# Allegro board BP2_02V7.brd
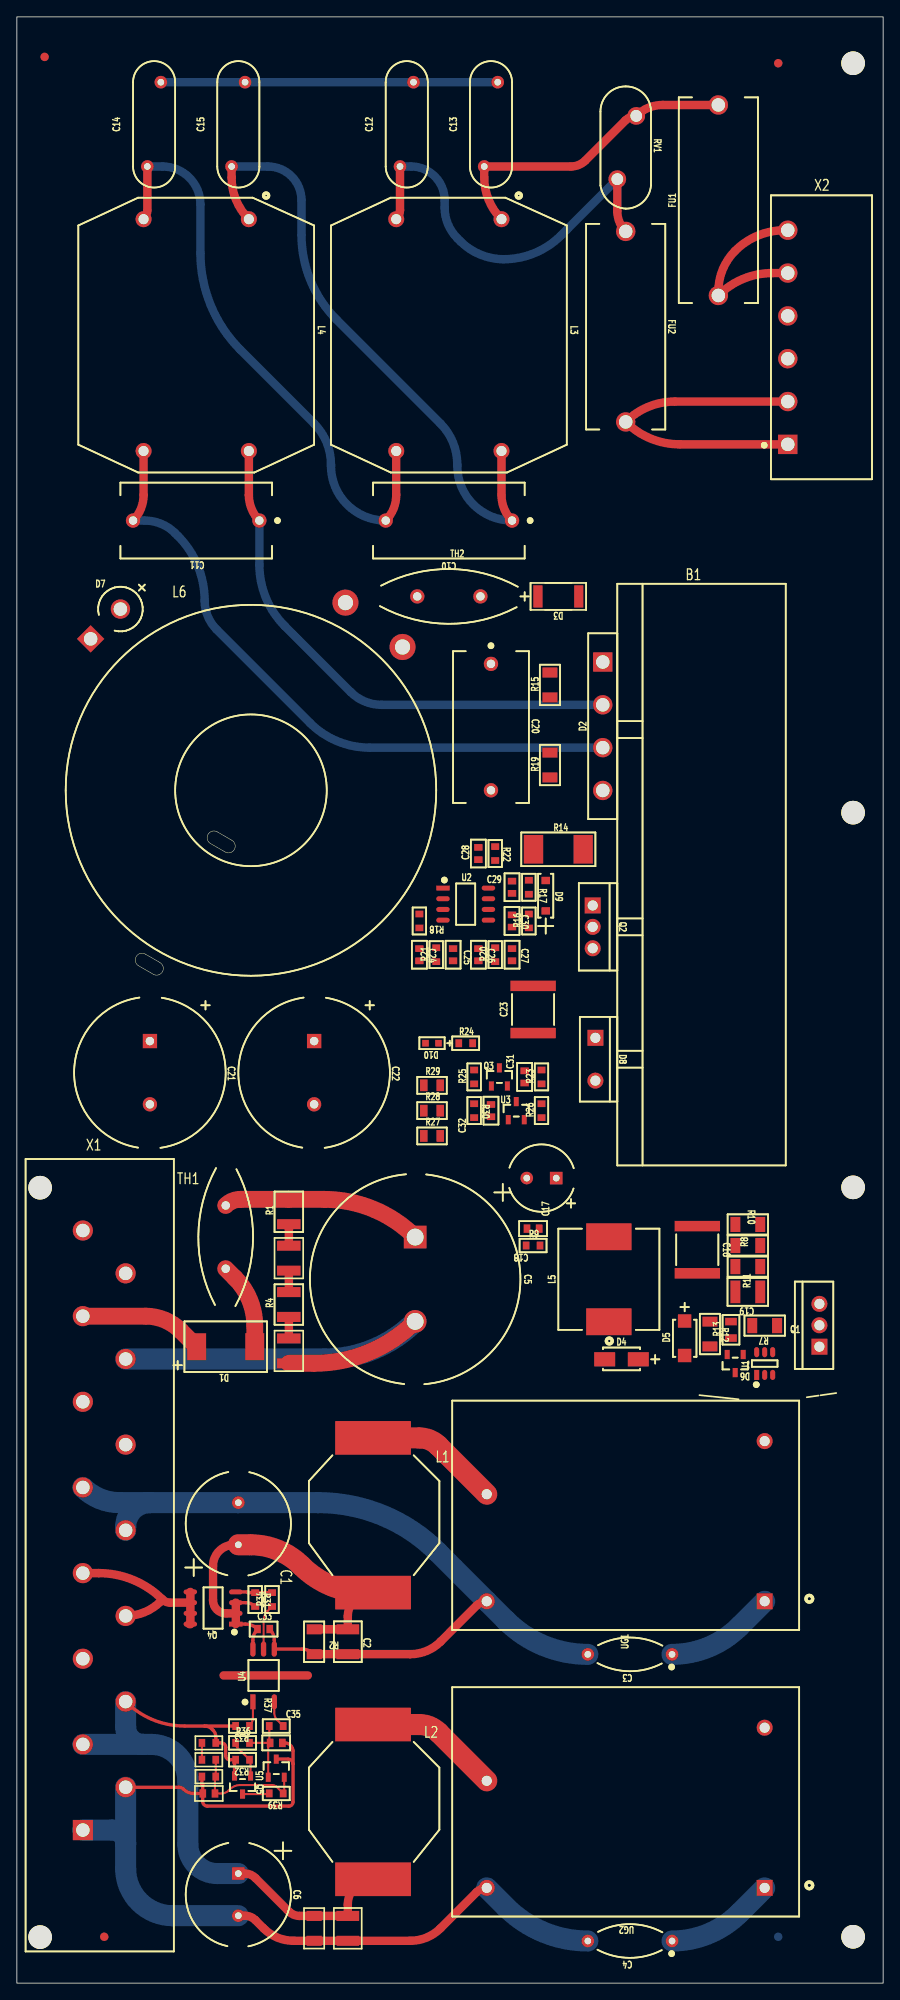
[diagram p0: board, top side]
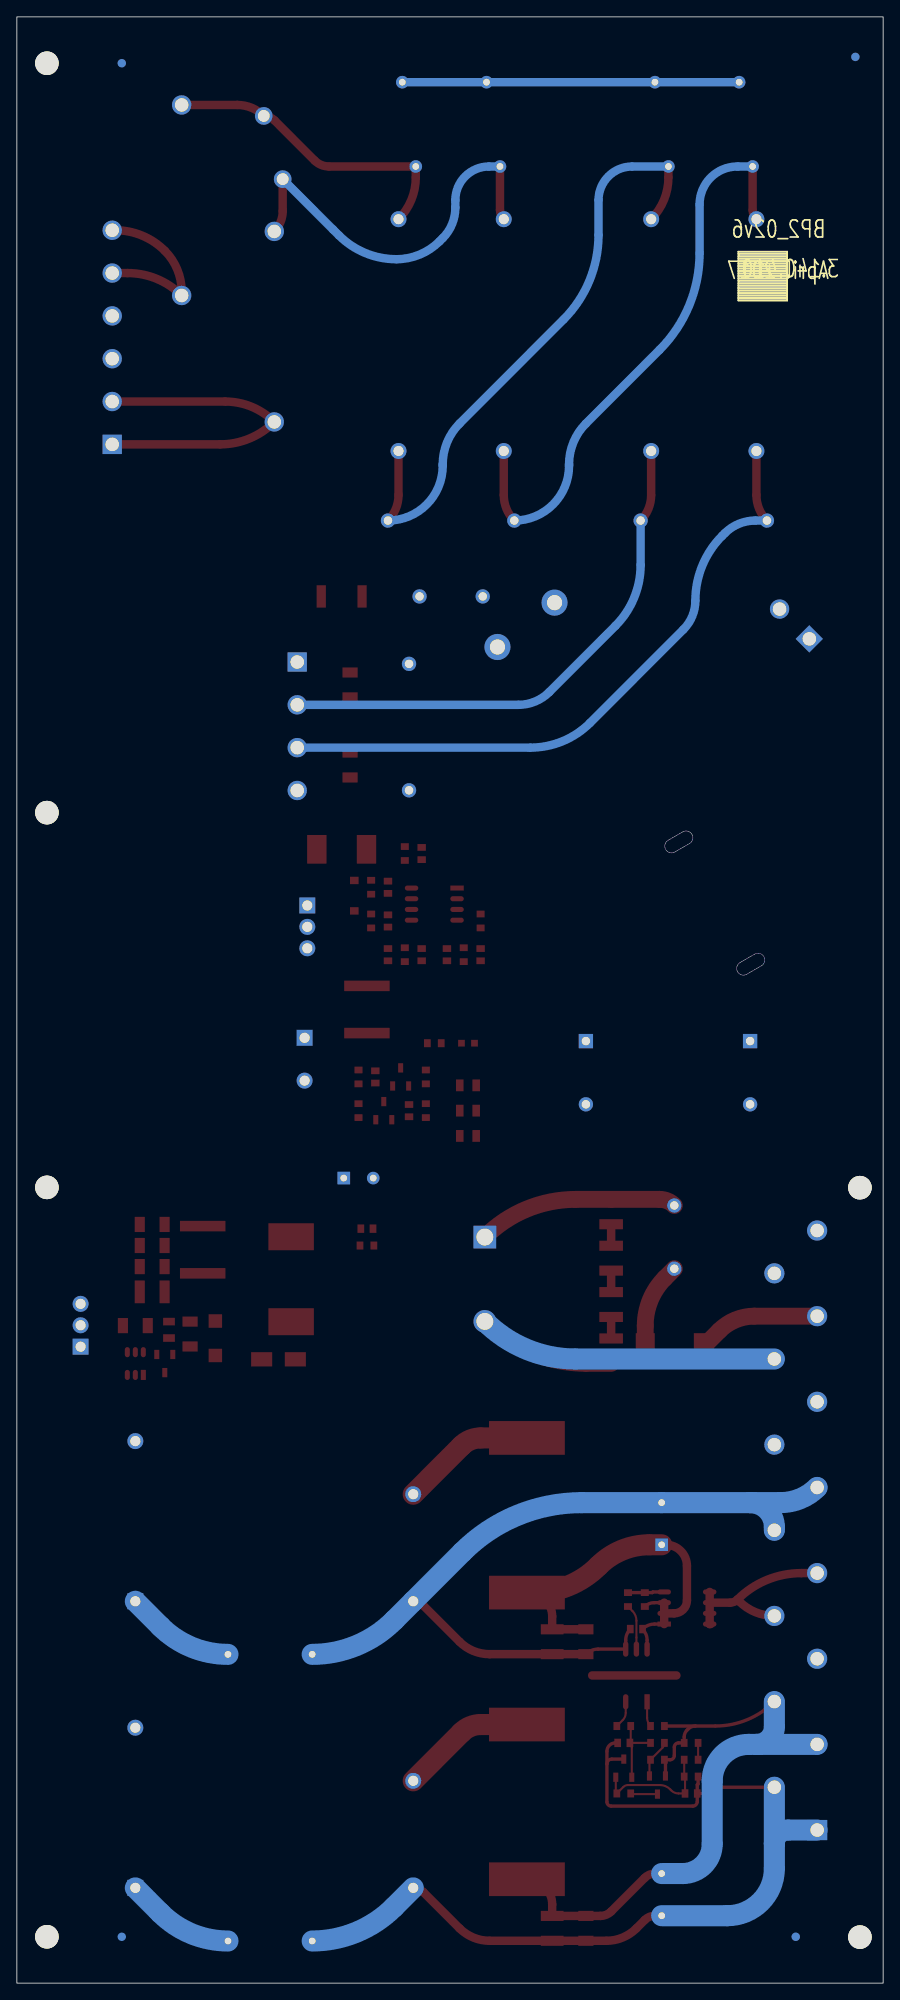
[diagram p1: board, bottom side, seen from below]

Outline 102.87 x 233.25 mm; copper layers: TOP, BOTTOM. Coordinates in mm from the lower left corner of the outline.
Outline path: rectangle 0,0 102.87,233.25

## Design rules (mm)
net group 220V: nets +UB -UB

## Placement (name value [footprint] x y rotation side)
B1  *3.181.006  [HEAT_SINK_AVAX_PWR_PFCS6_V1]  81.3 131.5 0 top
C1  470uF  [CAPPRR500W60L1250T1250H2000N]  26.3 54.5 90 top
C2  10uF  [CAPC3225X250N]  39.3 40.5 270 top
C3  470pF  [CAPRR1000W55L900T400H900N]  72.8 39 180 top
C4  470pF  [CAPRR1000W55L900T400H900N]  72.8 5 180 top
C5  100uF  [CAPPRR1000W55L2500T2500H2500N]  47.3 83.5 270 top
C6  470uF  [CAPPRR500W60L1250T1250H2000N]  26.3 10.5 270 top
C7  10uF  [CAPC3225X250N]  39.3 6.5 270 top
C10  0.47uF  [CAPRR1500W80L1800T900H1750N]  51.3 173.5 180 top
C11  0.47uF  [CAPRR1500W80L1800T900H1750N]  21.3 173.5 180 top
C12  2200pF  [CAPRR1000W60L1500T700H1000N]  46.3 220.5 90 top
C13  2200pF  [CAPRR1000W60L1500T700H1000N]  56.3 220.5 90 top
C14  2200pF  [CAPRR1000W60L1500T700H1000N]  16.3 220.5 90 top
C15  2200pF  [CAPRR1000W60L1500T700H1000N]  26.3 220.5 90 top
C16  0.1uF  [CAPC5750X200N]  80.8 87 270 top
C17  100u  [CAPPRR350W60L800T800H1150N]  62.3 95.5 180 top
C18  0.1uF  [CAPC1608X90N]  61.3 89.5 180 top
C19  10uF  [CAPC3225X200N]  86.8 82 180 top
C20  0.47uF  [CAPRR1500W80L1800T900H1750N]  56.3 149 270 top
C21  47uF  [CAPPRR750W80L1800T1800H2000N]  15.8 108 270 top
C22  47uF  [CAPPRR750W80L1800T1800H2000N]  35.3 108 270 top
C23  0.1uF  [CAPC5750X200N]  61.3 115.5 90 top
C24  *820pF  [CAPC1608X90N]  47.8 122 270 top
C25  *1500pF  [CAPC1608X90N]  51.8 122 270 top
C26  10uF  [CAPC1608X90N]  54.8 122 270 top
C27  0.15uF  [CAPC1608X90N]  58.8 122 270 top
C28  *680pF  [CAPC1608X90N]  54.8 134 90 top
C29  0.1uF  [CAPC1608X90N]  58.8 130 90 top
C30  1uf  [CAPC1608X90N]  58.8 126 270 top
C31  0.1uF  [CAPC1608X90N]  60.3 107.5 90 top
C32  10uF  [CAPC1608X90N]  56.3 103.5 90 top
C33  0.1uF  [CAPC1608X90N]  29.3 42 0 top
C34  0.01uF  [CAPC1608X90N]  22.8 22.5 180 top
C35  0.01uF  [CAPC1608X90N]  30.8 28.5 0 top
D1  S3M  [DIOM7959X265N]  24.8 75.5 180 top
D2  GBU8J-BP  [DIOB_GBU8J]  69.57 156.72 90 top
D3  SM4007  [DIOMELF5025N]  64.3 164.5 180 top
D4  US1M  [DIOM5126X240N]  71.8 74 0 top
D5  ES1J  [DIOM5026X250N]  79.3 76.5 90 top
D6  BZX84C24  [SOT95P230X110-3N]  85.3 73.5 270 top
D7  1N5408  [DIOAD1750W127L838D521N]  12.3 163 45 top
D8  C3D06060F  [TO_2200C508P0X1_1005X260X1570]  68.7 112.14 270 top
D9  MBR0540  [SOT95P375X128-2N]  62.8 129 270 top
D10  KP-1608SGC  [LEDC1608X110N]  49.3 111.5 180 top
FU1  MC000830  [SOCKET_MC000830]  83.3 211.5 90 top
FU2  MC000830  [SOCKET_MC000830]  72.3 196.5 270 top
L1  4.7uH 8.5A  [INDC22090X700N]  42.3 55.5 270 top
L2  4.7uH 8.5A  [INDC22090X700N]  42.3 21.5 270 top
L3  7mH  [WURTH_744834407]  51.3 195.5 270 top
L4  7mH  [WURTH_744834407]  21.3 195.5 270 top
L5  470uH 1A  [INDM120120X800N]  70.3 83.5 90 top
L6  *600uH 5A  [IND_PFCINDUCTOR_V1]  27.8 141.5 15 top
NOREF  -  [unnamed]  99.3 227.75 0 top
NOREF#2  -  [#2]  0 233.25 0 top
NOREF#3  -  [unnamed#2]  10.38 5.5 0 top
NOREF#4  -  [unnamed#2]  3.3 228.5 0 top
NOREF#5  -  [unnamed]  99.3 138.85 0 top
NOREF#6  -  [unnamed]  99.3 5.5 0 top
NOREF#7  -  [#2]  102.87 0 90 top
NOREF#8  -  [unnamed#2]  90.41 227.75 0 top
NOREF#9  -  [unnamed]  99.3 94.4 0 top
NOREF#10  -  [unnamed#2]  90.41 227.75 180 bottom
NOREF#11  -  [unnamed#2]  3.3 228.5 180 bottom
NOREF#12  -  [#2]  14.3 202.5 180 bottom
NOREF#13  -  [unnamed#2]  90.41 5.5 180 bottom
NOREF#14  -  [unnamed#2]  10.38 5.5 180 bottom
Q1  FJP2145TU  [TO_2200C254P0X1_1036X292X1595]  95.3 75.5 90 top
Q2  IPP60R099C7XKSA1  [TO_2200C254P0X1_1036X292X1595]  68.38 127.84 270 top
Q3  IRLML5103  [SOT95P230X110-3N]  57.3 107.5 90 top
Q4  IRF7410  [SOIC127P600X175-8N]  23.3 44.5 180 top
Q5  IRLML5103  [SOT95P230X110-3N]  26.8 23.5 270 top
R1  33k  [RESC3226X55N]  32.3 91.5 90 top
R2  1k  [RESC3216X50N]  35.3 40.5 270 top
R3  33k  [RESC3226X55N]  32.3 86 90 top
R4  33k  [RESC3226X55N]  32.3 80.5 90 top
R5  33k  [RESC3226X55N]  32.3 75 90 top
R6  4.7k  [RESC3216X50N]  35.3 6.5 270 top
R7  1.00  [RESC3216X50N]  88.8 78 180 top
R8  200k  [RESC3216X50N]  86.8 90 180 top
R9  10k  [RESC1608X45N]  61.3 87.5 0 top
R10  200k  [RESC3216X50N]  86.8 87.5 0 top
R11  200k  [RESC3216X50N]  86.8 85 180 top
R12  150k  [RESC3216X50N]  82.3 77 270 top
R13  51.0k  [RESC2013X50N]  84.8 77.5 90 top
R14  *0.051  [RESC6432X55N]  64.3 134.5 0 top
R15  510k  [RESC3216X50N]  63.3 154 90 top
R16  10k  [RESC1608X45N]  60.8 126 90 top
R17  3.3  [RESC1608X45N]  60.8 130 270 top
R18  220  [RESC1608X45N]  47.8 126 270 top
R19  510k  [RESC3216X50N]  63.3 144.5 90 top
R20  51.0k  [RESC1608X45N]  56.8 122 90 top
R21  18.0k  [RESC1608X45N]  49.8 122 90 top
R22  14.7k  [RESC1608X45N]  56.8 134 270 top
R23  2k  [RESC1608X45N]  62.3 107.5 90 top
R24  10k  [RESC1608X45N]  53.3 111.5 0 top
R25  1M  [RESC1608X45N]  54.3 107.5 90 top
R26  4.7k  [RESC1608X45N]  62.3 103.5 90 top
R27  100k  [RESC2013X50N]  49.3 100.5 0 top
R28  100k  [RESC2013X50N]  49.3 103.5 0 top
R29  100k  [RESC2013X50N]  49.3 106.5 0 top
R30  10.0k  [RESC1608X45N]  54.3 103.5 270 top
R31  10k  [RESC1608X45N]  28.3 45.5 270 top
R32  10k  [RESC1608X45N]  26.8 26.5 180 top
R33  2.2k  [RESC1608X45N]  26.8 30.5 180 top
R34  10k  [RESC1608X45N]  30.3 45.5 90 top
R35  10.5k  [RESC1608X45N]  22.8 28.5 0 top
R36  10k  [RESC1608X45N]  26.8 28.5 0 top
R37  2.2k  [RESC1608X45N]  30.8 30.5 0 top
R38  8.25k  [RESC1608X45N]  22.8 26.5 0 top
R39  255k  [RESC1608X45N]  30.8 22.5 180 top
R40  2.4k  [RESC1608X45N]  22.8 24.5 0 top
RV1  JVR-14N391K  [VAR_JVR-14N391K]  71.3 221.5 270 top
TH1  47  [RESRB750W80L1750T650H2300]  24.8 88.5 270 top
TH2  7  [RESRB750W80L1750T650H2300]  51.3 164.5 0 top
U1  UCC28722DBV  [SOT95P280X145-6N]  88.8 73.5 90 top
U2  UCC28180D  [SOIC127P600X175-8N]  53.3 128 0 top
U3  TL431AIDBZ  [SOT95P230X110-3N]  59.3 103.5 90 top
U4  ACPL-M50L-500E  [SOIC127P700X250-6N]  29.3 36.5 90 top
U5  TL431AIDBZ  [SOT95P230X110-3N]  30.8 25.5 90 top
UG1  TMG 15105  [DIP1900P3300X1910-4N]  72.3 55.5 180 top
UG2  TMG 15124  [DIP1900P3300X1910-4N]  72.3 21.5 180 top
X1  09061152911  [DIN41612-H15]  7.84 18.16 270 top
X2  231-536/001-000  [WAGO_231-536]  91.55 182.54 90 top

## Library data of the parts
B1 = heat sink_0
C1 C5 C6 C17 C21 C22 = CAPACITOR_POL
C2-C4 C7 C10-C16 C18-C20 C23-C35 = CAPACITOR
D1 D3-D5 = DIODE
D2 = DIOD_MOST_KBU6M_0
D6 = STAB_3
D7 = DIODE: alternate symbols: (DIOADV500W125L530D530N)
D8 D9 = SHOTTKY
D10 = LED
FU1 FU2 = HOLDER_FUSE
L1 L2 = INDUCTOR_F
L3 L4 = DLW21H
L5 L6 = INDUCTOR
Q1 = TransistorNPN_TO220
Q2 = MOS_n_channel_induced_2
Q3 Q5 = MOS_p_channel_induced_1
Q4 = IRF7410_v2
R1 R3-R5 = R_0.5W
R2 R6-R40 = RESISTOR
RV1 = VARISTOR
TH1 = THERMISTOR
TH2 = thermistor
U1 = UCC28722
U2 = UCC28180
U3 U5 = TL431AIDBZ
U4 = ACPL-M50L
UG1 UG2 = TRACO_TMG_15
X1 = DIN41612-H15_10
X2 = CONN6_1

## Footprints (pads in the part's own frame, mm; a bottom-side part is the same pattern mirrored in y, then rotated)
CAPC1608X90N
  rect 0.8x1 smd: 1(-0.725,0) 2(0.725,0)
CAPC3225X200N
  rect 1.2x2.7 smd: 1(-1.475,0) 2(1.475,0)
CAPC3225X250N
  rect 1.2x2.7 smd: 1(-1.475,0) 2(1.475,0)
CAPC5750X200N
  rect 1.25x5.4 smd: 1(-2.8,0) 2(2.8,0)
CAPPRR350W60L800T800H1150N
  rect 1.5x1.5 hole 0.8: 1(-1.75,0)
  round 1.5 hole 0.8: 2(1.75,0)
CAPPRR500W60L1250T1250H2000N
  rect 1.5x1.5 hole 0.8: 1(-2.5,0)
  round 1.5 hole 0.8: 2(2.5,0)
CAPPRR750W80L1800T1800H2000N
  rect 1.7x1.7 hole 1: 1(-3.75,0)
  round 1.7 hole 1: 2(3.75,0)
CAPPRR1000W55L2500T2500H2500N
  rect 2.7x2.7 hole 2: 1(-5,0)
  round 2.7 hole 2: 2(5,0)
CAPRR1000W55L900T400H900N
  round 1.5 hole 0.8: 1(-5,0) 2(5,0)
CAPRR1000W60L1500T700H1000N
  round 1.5 hole 0.8: 1(-5,0.8) 2(5,-0.8)
CAPRR1500W80L1800T900H1750N
  round 1.7 hole 1: 1(-7.5,0) 2(7.5,0)
DIN41612-H15
  round 2.8 hole 2.8 unplated: (-76.2,-5.08) (12.7,-5.08)
  rect 2.4x2.4 hole 1.6: 4(0,0)
  round 2.4 hole 1.6: 6(-5.08,5.08) 8(-10.16,0) 10(-15.24,5.08) 12(-20.32,0) 14(-25.4,5.08) 16(-30.48,0) 18(-35.56,5.08) 20(-40.64,0) 22(-45.72,5.08) 24(-50.8,0) 26(-55.88,5.08) 28(-60.96,0) 30(-66.04,5.08) 32(-71.12,0)
DIOAD1750W127L838D521N
  rect 2.3x2.3 hole 1.6: 1(-5,0)
  round 2.3 hole 1.6: 2(0,0)
DIOB_GBU8J
  rect 2.3x2.3 hole 1.6: 1(0,0)
  round 2.3 hole 1.6: 2(-5.08,0) 3(-10.16,0) 4(-15.24,0)
DIOM5026X250N
  rect 1.6x1.6 smd: 1(-2.043,0) 2(2.043,0)
DIOM5126X240N
  rect 2.5x1.7 smd: 1(-2,0) 2(2,0)
DIOM7959X265N
  rect 2.26x3.2 smd: 1(-3.45,0) 2(3.45,0)
DIOMELF5025N
  rect 1.1x2.65 smd: 1(-2.425,0) 2(2.425,0)
DIP1900P3300X1910-4N
  rect 1.9x1.9 hole 1.2: 1(-16.5,10.2)
  round 1.9 hole 1.2: 2(-16.5,-8.8) 3(16.5,10.2) 4(16.5,-2.5)
IND_PFCINDUCTOR_V1
  round 3.1 hole 1.8: 1(16.6,18.6) 2(21.787,11.762)
INDC22090X700N
  rect 4x9 smd: 1(-9.175,0) 2(9.175,0)
INDM120120X800N
  rect 3.2x5.4 smd: 1(-5.038,0) 2(5.038,0)
LEDC1608X110N
  rect 0.8x0.8 smd: 1(-0.775,0) 2(0.775,0)
RESC1608X45N
  rect 0.8x0.95 smd: 1(-0.825,0) 2(0.825,0)
RESC2013X50N
  rect 0.9x1.4 smd: 1(-0.975,0) 2(0.975,0)
RESC3216X50N
  rect 1.2x1.8 smd: 1(-1.475,0) 2(1.475,0)
RESC3226X55N
  rect 1.2x2.8 smd: 1(-1.475,0) 2(1.475,0)
RESC6432X55N
  rect 2.3x3.4 smd: 1(-2.95,0) 2(2.95,0)
RESRB750W80L1750T650H2300
  round 1.7 hole 1: 1(-3.75,0) 2(3.75,0)
SOCKET_MC000830
  round 2.3 hole 1.6: 1(-11.3,0) 2(11.3,0)
SOIC127P600X175-8N
  rect 1.6x0.6 smd: 1(-2.7,1.905)
  oval 1.6x0.6 smd: 2(-2.7,0.635) 3(-2.7,-0.635) 4(-2.7,-1.905) 5(2.7,-1.905) 6(2.7,-0.635) 7(2.7,0.635) 8(2.7,1.905)
SOIC127P700X250-6N
  rect 1.8x0.64 smd: 1(-3.125,1.27)
  oval 1.8x0.64 smd: 3(-3.125,-1.27) 4(3.125,-1.27) 5(3.125,0) 6(3.125,1.27)
SOT95P230X110-3N
  rect 1.1x0.6 smd: 1(-1.075,0.95) 2(-1.075,-0.95) 3(1.075,0)
SOT95P280X145-6N
  rect 1.2x0.6 smd: 1(-1.35,0.95)
  oval 1.2x0.6 smd: 2(-1.35,0) 3(-1.35,-0.95) 4(1.35,-0.95) 5(1.35,0) 6(1.35,0.95)
SOT95P375X128-2N
  rect 0.88x1.02 smd: 1(-1.805,0) 2(1.805,0)
TO_2200C254P0X1_1036X292X1595
  rect 1.9x1.9 hole 1.2: 1(0,0)
  round 1.9 hole 1.2: 2(2.54,0) 3(5.08,0)
TO_2200C508P0X1_1005X260X1570
  rect 1.9x1.9 hole 1.2: 1(0,0)
  round 1.9 hole 1.2: 2(5.08,0)
unnamed
  round 2.8 hole 2.8 unplated: (0,0)
unnamed#2
  round 1 smd: (0,0)
VAR_JVR-14N391K
  round 2.1 hole 1.4: 1(0,2.25) 2(7.5,0)
WAGO_231-536
  rect 2.3x2.3 hole 1.6: 1(0,0)
  round 2.3 hole 1.6: 2(5.08,0) 3(10.16,0) 4(15.24,0) 5(20.32,0) 6(25.4,0)
WURTH_744834407
  round 1.9 hole 1.2: 1(-13.75,6.25) 2(13.75,6.25) 3(13.75,-6.25) 4(-13.75,-6.25)

## Nets
+15V: C17.1 C18.1 C31.1 D5.2(ANODE) L5.2 Q3.2(S) R9.2 R12.1 R23.2
GND: C1.2 C2.2 C3.2 C33.2 R2.2 U4.4(GND) UG1.3(-VOUT) X1.18(GND#18) X1.20(GND#20)
GNDE: C4.2 C6.2 C7.2 C34.2 C35.2 R6.2 R40.1 U5.3(ANODE) UG2.3(-VOUT) X1.4(GNDE#4) X1.6(GNDE#6)
VCC: C29.1 C30.1 Q3.3(D) R24.2 R25.2 U2.7(VCC)
VIN_15V: C16.1 D3.1(CATHODE) Q1.2(C) R8.2
+5B: Q4.5(D5) Q4.6(D6) Q4.7(D7) Q4.8(D8) X1.14(+5B#14) X1.16(+5B#16)
+5BO: C1.1 C2.1 C33.1 L1.2 Q4.1(S1) Q4.2(S2) Q4.3(S3) R2.1 R31.2 U4.6(VCC)
+24BE: C6.1 C7.1 L2.2 Q5.2(S) R6.1 R32.2 R33.2 R35.2 X1.8(+24BE#8) X1.10(+24BE#10)
+UB: D1.2(ANODE) X1.28(+UB)
-UB: C3.1 C4.1 C5.2 R5.1 UG1.1(AC_L) UG2.1(AC_L) X1.26(-UB)
BAT+: FU1.1 X2.5(+BAT#5) X2.6(+BAT#6)
BAT-: FU2.2 X2.1(-BAT#1) X2.2(-BAT#2)
BATF+: D2.1(+) D3.2(ANODE) R28.1 TH2.2
BATF-: C20.2 D2.4(-) R14.2 R18.1
BATP+: C21.1 C22.1 C23.1 D7.1(CATHODE) D8.1(CATHODE) R15.2 X1.32(+BAT)
BATP-: C16.2 C17.2 C18.2 C21.2 C22.2 C23.2 C24.2 C25.2 C26.2 C27.2 C28.2 C29.2 C30.2 C31.2 C32.2 D4.2(ANODE) D10.2(CATHODE) Q2.3(S) R9.1 R14.1 R16.1 R21.1 R22.1 R30.1 U2.1(GND) U3.3(ANODE) X1.30(-BAT)
COM: C12.2 C13.2 C14.2 C15.2
FREQ: R21.2 U2.4(FREQ)
GATE: D9.1(CATHODE) R17.1 U2.8(GATE)
ICOMP: C25.1 U2.2(ICOMP)
ISENSE: C24.1 R18.2 U2.3(ISENSE)
L1: C13.1 FU1.2 L3.1 RV1.1
L2: C10.1 C15.1 L3.2 L4.1
L3: C11.1 D2.2(IN1) L4.2
N1: C12.1 FU2.1 L3.4 RV1.2
N2: C10.2 C14.1 L3.3 L4.4
N3: C11.2 D2.3(IN2) L4.3
SW: D8.2(ANODE) L6.2 Q2.2(D)
SW_15V: C19.2 D4.1(CATHODE) D6.1(ANODE) L5.1 R7.2 R13.2 U1.5(GND)
VCOMP: C27.1 R20.2 U2.5(VCOMP)
VSENSE: C28.1 R19.1 R22.2 U2.6(VSENSE)
N178472: L1.1 UG1.4(+VOUT)
N178504: L2.1 UG2.4(+VOUT)
N264183: C20.1 D7.2(ANODE) L6.1 TH2.1
N266170: D9.2(ANODE) Q2.1(G) R16.2 R17.2
N281968: C19.1 D5.1(CATHODE) D6.3(CATHODE) R11.1 U1.2(VDD)
N281972: R10.1 R11.2
N281976: R8.1 R10.2
N281988: Q1.1(B) U1.3(DRV)
N282040: Q1.3(E) R7.1 U1.4(CS)
N282208: R12.2 R13.1 U1.6(VS)
N284770: C5.1 R1.2 TH1.1 UG1.2(AC_N) UG2.2(AC_N)
N289417: Q3.1(G) R23.1 R26.2
N289519: C32.1 R25.1 R29.2 R30.2 U3.2(REF)
N289611: R27.2 R29.1
N289615: R27.1 R28.2
N305567: R15.1 R19.2
N318635: R34.1 U4.5(VO)
N318907: Q4.4(G) R31.1 R34.2
N320703: C34.1 R38.2 R39.1 R40.2 U5.2(REF)
N321392: Q5.1(G) R32.1 R36.1
N323386: C35.1 R36.2 R37.1 U5.1(CATHODE)
N324487: R33.1 U4.1(ANODE)
N324491: R37.2 U4.3(CATHODE)
N324879: Q5.3(D) R39.2
N2894330: R26.1 U3.1(CATHODE)
N2966660: C26.1 R20.1
N3039720: D10.1(ANODE) R24.1
N3103190: R1.1 R3.2
N3103350: R3.1 R4.2
N3103510: R4.1 R5.2
N3108830: D1.1(CATHODE) TH1.2
N3206290: R35.1 R38.1

Pads without a net: D6 2; U1 1; X1 12 22 24; X2 3 4

## Routing (per net, layer and track width the routed paths; a pad name or vN(x,y) marks a point on that pad's centre or on a via; arc(x,y) is an arc through that point)
GND: length 101.6
  TOP w0.4: C33.2 arc(30.43,41.4) 30.57,40.68 U4.4 33.85,39.62 arc(34.64,39.47) R2.2
  TOP w1: R2.2 C2.2 46.74,39.02 arc(48.67,39.41) 50.3,40.5 54.6,44.8 arc(55.15,45.17) UG1.3
  BOTTOM w2.5: 15.8,57 12.19,57 arc(9.83,57.47) X1.20 ; 15.8,57 C1.2 35.8,57 arc(43.47,55.47) 49.97,51.13 UG1.3 58.07,43.03 arc(62.53,40.05) C3.2 ; 15.8,57 arc(13.76,56.16) 12.92,54.12 X1.18
GNDE: length 113
  TOP w0.4: U5.3 32.22,26.57 arc(32.63,26.41) 32.8,26 ; C34.2 22.08,23.52 21.97,23.62 R40.1 ; C34.2 21.01,22.5 arc(20.35,22.63) 19.8,23 arc(19.53,23.18) 19.22,23.24 X1.6 ; C34.2 22.08,21.54 arc(22.23,21.16) 22.62,21 32.3,21 arc(32.65,21.15) 32.8,21.5 32.8,26 ; 55.66,11.44 UG2.3 ; C35.2 31.8,28.5 arc(32.51,28.21) 32.8,27.5 32.8,26
  TOP w1: C6.2 27.09,8 arc(27.75,7.87) 28.3,7.5 29.3,6.5 arc(30.93,5.41) 32.86,5.03 R6.2 C7.2 46.74,5.03 arc(48.67,5.41) 50.3,6.5 54.6,10.8 arc(55.15,11.17) UG2.3
  BOTTOM w2.5: C6.2 18.51,8 arc(14.56,9.64) 12.92,13.59 12.92,16.57 ; 12.92,16.57 X1.6 ; 12.92,16.57 arc(12.45,17.69) 11.33,18.16 X1.4 ; UG2.3 58.07,9.03 arc(62.53,6.05) C4.2
+5B: length 22.6
  TOP w1: Q4.5 Q4.6 ; Q4.6 Q4.7 Q4.8 20.48,42.59 ; Q4.6 18.18,45.13 arc(17.7,45.23) 17.3,45.5 ; X1.16 9.72,48.64 arc(13.82,47.82) 17.3,45.5 ; 17.3,45.5 17.09,45.28 arc(15.17,44.01) X1.14
+5BO: length 49.8
  TOP w0.4: Q4.1 27.14,42.59 arc(27.92,42.44) C33.1 arc(28.17,41.4) 28.03,40.68 U4.6 ; Q4.3 27.19,45.13 arc(27.79,45.02) R31.2
  TOP w1: C1.1 25.8,52 arc(24.03,51.27) 23.3,49.5 23.3,45.4 arc(23.75,44.31) 24.83,43.87 Q4.2 ; Q4.2 Q4.1 ; Q4.2 Q4.3 ; R2.1 C2.1 39.3,43.5 arc(40.13,45.5) 42.12,46.33
  TOP w2.5: L1.2 41.46,46.33 arc(37.32,47.15) 33.8,49.5 arc(31.03,51.35) 27.76,52 C1.1
+24BE: length 80.2
  TOP w0.4: 22.3,30.5 19.92,30.5 arc(16.13,31.25) X1.10 ; 22.3,30.5 R33.2 ; 22.3,30.5 arc(22.76,30.41) 23.15,30.15 23.3,30 arc(23.54,29.64) 23.62,29.21 R35.2 24.3,28.5 arc(24.65,28.35) 24.8,28 24.8,27 arc(24.95,26.65) 25.3,26.5 R32.2 arc(25.88,26.36) 25.85,26.2 Q5.2
  TOP w1: 42.29,12.32 L2.2 arc(40.18,11.45) 39.3,9.32 C7.1 R6.1 33.57,7.97 arc(32.88,8.11) 32.3,8.5 28.3,12.5 arc(27.75,12.87) 27.09,13 C6.1
  BOTTOM w2.5: 15.02,28.32 15.98,28.32 arc(19.03,27.05) 20.3,24 20.3,16.5 arc(21.33,14.03) 23.8,13 C6.1 ; 15.02,28.32 X1.8 ; 15.02,28.32 arc(13.53,28.93) 12.92,30.42 X1.10
+UB: length 14.8
  TOP w2: D1.2 19.45,77.4 arc(17.55,78.67) 15.3,79.12 X1.28
-UB: length 78.1
  TOP w2: R5.1 35.29,73.53 arc(41.79,74.82) C5.2
  BOTTOM w2.5: X1.26 36.53,74.04 arc(42.36,75.2) C5.2 ; UG1.1 85.82,42.32 arc(82.14,39.86) C3.1 ; UG2.1 85.82,8.32 arc(82.14,5.86) C4.1
BAT+: length 21.7
  TOP w1: 91.55,207.94 91.19,207.94 arc(88,207.3) 85.3,205.5 arc(83.82,203.28) 83.3,200.67 FU1.1 arc(86.24,202.17) 89.72,202.86 91.55,202.86
BAT-: length 39.8
  TOP w1: X2.2 78.14,187.62 arc(74.98,186.99) FU2.2 arc(75.25,183.23) 78.73,182.54 X2.1
COM: length 40
  BOTTOM w1: C14.2 C15.2 C12.2 C13.2
L1: length 37.2
  TOP w1: FU1.2 76.69,222.8 arc(74.99,222.46) RV1.1 arc(72.86,221.36) 72.27,220.97 67.51,216.21 arc(66.72,215.68) 65.8,215.5 C13.1 55.5,214.2 arc(56.03,211.52) L3.1
L2: length 74.4
  TOP w1: L3.2 57.55,176.52 arc(57.87,174.88) C10.1 ; C15.1 25.5,214.2 arc(26.03,211.52) L4.1
  BOTTOM w1: C15.1 29.8,215.5 arc(32.63,214.33) 33.8,211.5 33.8,207.38 arc(34.88,201.95) 37.96,197.34 50.3,185 arc(51.78,182.78) 52.3,180.17 52.3,180 arc(54.2,175.4) C10.1
L3: length 63.3
  TOP w1: L4.2 27.55,176.52 arc(27.87,174.88) C11.1
  BOTTOM w1: C11.1 28.8,168.24 arc(29.58,164.32) 31.8,161 39.65,153.15 arc(41.32,152.03) 43.3,151.64 D2.2
N1: length 48.8
  TOP w1: RV1.2 71.3,210.21 arc(71.56,208.91) FU2.1 ; C12.1 45.5,210.34 arc(45.38,209.75) L3.4
  BOTTOM w1: L3.4 45.05,209.02 ; C12.1 46.8,215.5 arc(49.63,214.33) 50.8,211.5 50.8,210.62 arc(51.19,208.66) 52.3,207 52.68,206.62 arc(55.03,205.05) 57.8,204.5 arc(61.49,205.24) 64.63,207.33 65.33,208.04 RV1.2
N2: length 70.5
  TOP w1: L3.3 45.05,176.52 arc(44.73,174.88) C10.2 ; C14.1 15.5,210.34 arc(15.38,209.75) L4.4
  BOTTOM w1: C14.1 17.3,215.5 arc(20.48,214.18) 21.8,211 21.8,205.22 arc(23.03,199.01) 26.55,193.75 35.3,185 arc(36.78,182.78) 37.3,180.17 37.3,180 arc(39.2,175.4) C10.2
N3: length 78
  TOP w1: L4.3 15.05,176.52 arc(14.73,174.88) C11.2
  BOTTOM w1: D2.3 41.9,146.56 arc(38.06,147.32) 34.8,149.5 23.71,160.59 arc(22.67,162.15) 22.3,164 arc(21.47,168.16) 19.12,171.68 18.8,172 arc(17.14,173.11) 15.18,173.5 C11.2
N178472: length 16.1
  TOP w2.5: UG1.4 50.06,63.74 arc(49.02,64.43) 47.8,64.67 L1.1
N178504: length 16.1
  TOP w2.5: L2.1 47.8,30.68 arc(49.02,30.43) 50.06,29.74 UG2.4
N284770: length 23.9
  TOP w2: TH1.1 arc(25.6,92.79) 26.55,92.97 R1.2 36.5,92.97 arc(42.34,91.81) C5.1
N318635: length 5.4
  TOP w0.25: R34.1 29.78,44.15 arc(29.42,43.62) 29.3,43 U4.5
N318907: length 4.3
  TOP w0.4: R34.2 R31.1 27.42,46.33 27.34,46.41 Q4.4
N320703: length 14.8
  TOP w0.25: R38.2 R40.2 arc(23.55,24.39) 23.52,24.26 C34.1 24.3,22.5 arc(24.76,22.59) 25.15,22.85 25.3,23 arc(25.85,23.37) 26.51,23.5 30.3,23.5 arc(30.6,23.44) 30.86,23.27 R39.1 arc(31.72,22.64) 31.75,22.8 U5.2
N321392: length 4.6
  TOP w0.25: Q5.1 27.75,26.2 arc(27.72,26.36) R32.1 26.22,27.9 arc(26.04,28.18) R36.1
N323386: length 8.6
  TOP w0.25: U5.1 29.85,27.96 arc(29.91,28.25) C35.1 ; R37.1 29.97,28.74 arc(30,28.61) C35.1 ; R36.2 C35.1
N324487: length 3
  TOP w0.25: U4.1 28.03,31.48 arc(27.92,30.95) R33.1
N324491: length 3.3
  TOP w0.25: R37.2 30.92,31.2 arc(30.66,31.59) 30.57,32.05 U4.3
N324879: length 3.2
  TOP w0.25: Q5.3 29.79,22.43 arc(29.89,22.44) R39.2
N3103190: length 2.6
  TOP w1: R1.1 R3.2
N3103350: length 2.6
  TOP w1: R3.1 R4.2
N3103510: length 2.6
  TOP w1: R4.1 R5.2
N3108830: length 10.3
  TOP w2: TH1.2 25.92,83.63 arc(27.64,81.05) 28.25,78 D1.1
N3206290: length 2
  TOP w0.25: R38.1 R35.1

## Text on the board
Ref Des/Silkscreen Bottom: 3.140.410 | April 2017 | BP2_02v6
ASSEMBLY_TOP: 3.140.280 | December 2016 | BP2_02v5
